# Altium PCB OD12_LCD__Layout.PcbDoc
Units mil, origin at the board's own origin, x right, y up, seen from the top; angles counter-clockwise.
Board outline 7224.41 x 2559.06 mil, 2 copper layers (Top Layer, Bottom Layer); 78 components, 63 nets, 348 pads, 111 vias.
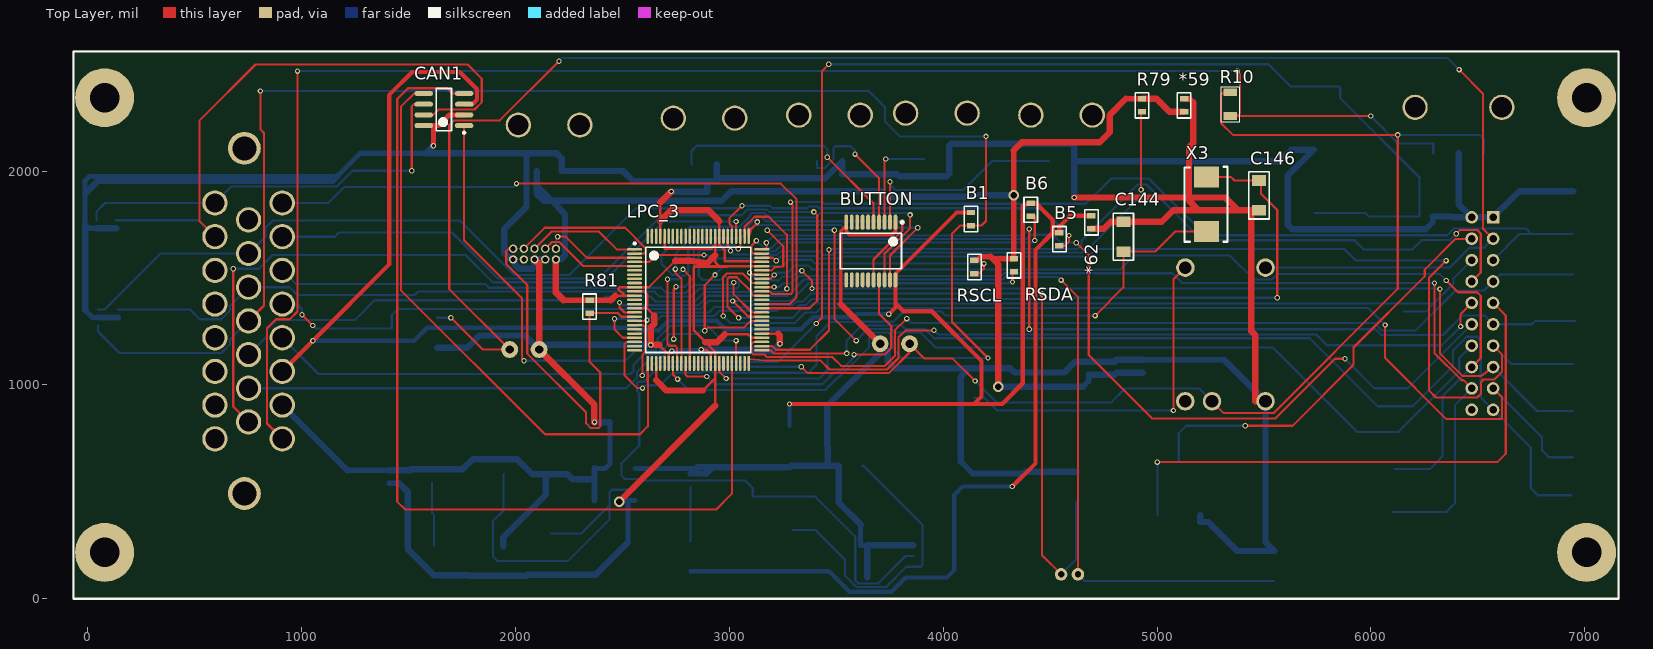
[diagram p0: Top Layer view]
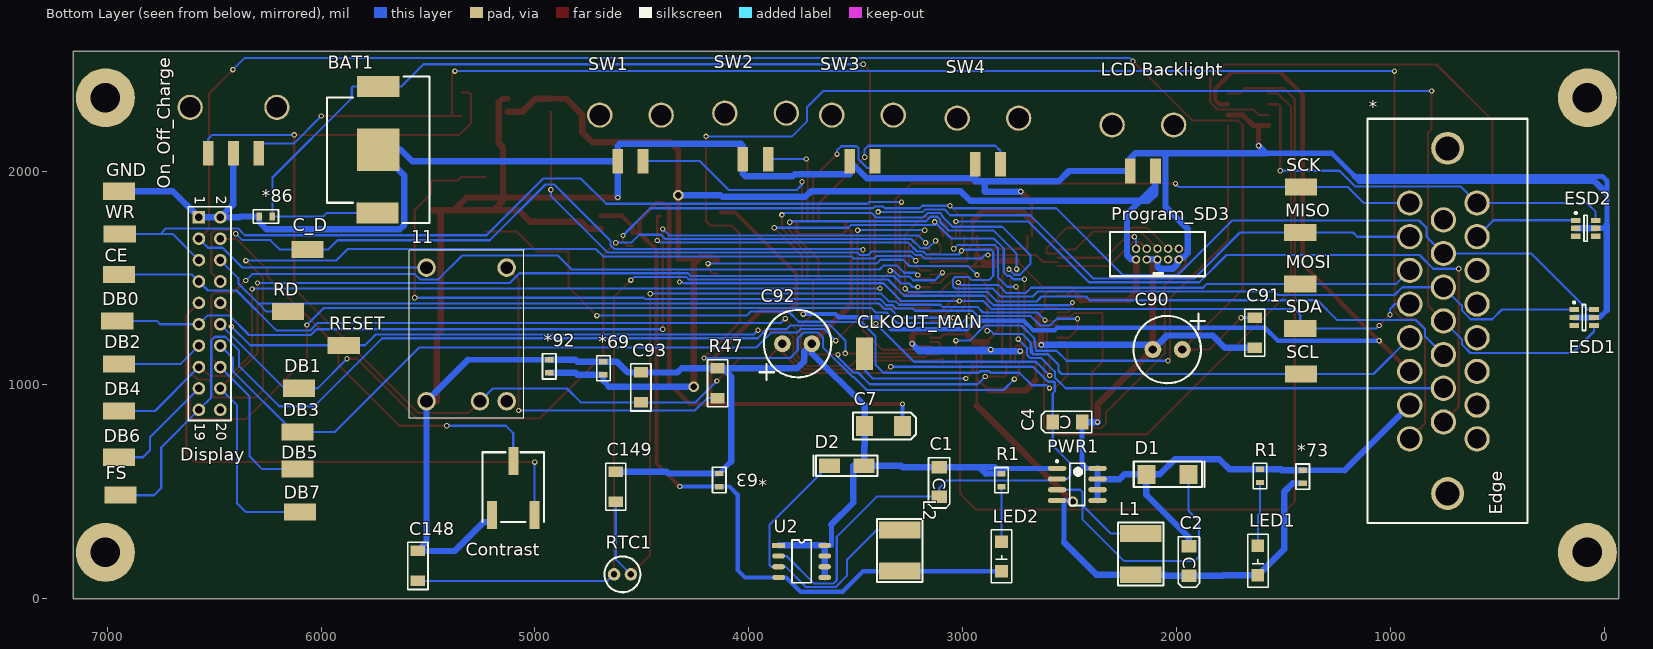
[diagram p1: Bottom Layer view, seen from below]

## Layer stack, top to bottom
Top Solder: solder mask 0.4, Solder Resist, Dk 3.5
Top Layer: signal copper 1.4
Dielectric1: dielectric 12.6, FR-4, Dk 4.8
Bottom Layer: signal copper 1.4
Bottom Solder: solder mask 0.4, Solder Resist, Dk 3.5

## Board outline
-66.93,0 7157.48,0 7157.48,2559.06 -66.93,2559.06

## Design rules (kind name [scope] priority, off if disabled: settings)
Clearance Via-Pad [IsVia vs IsPad] p1: gap=10
Clearance "Via Clearance" [IsVia vs IsVia] p2: gap=10
Clearance [All] p3: gap=7
Clearance Clearance_1 [All] p4: gap=10
Height [All] p1: minheight=0 maxheight=2000 prefheight=500
PlaneClearance [All] p1: clearance=10
PlaneConnect [All] p1: planeconnectstyle=Relief reliefexpansion=10 reliefentries=2 reliefconductorwidth=10 reliefairgap=10
PolygonConnect [All] p1: connectstyle=Relief reliefconductorwidth=10 reliefentries=2 polygonreliefangle="90 Angle" airgapwidth=10
RoomDefinition U_power_supplies [InComponentClass('U_power_supplies')] p1: confinementstyle=ConfineIn formatcopy=TRUE lockcomponents=FALSE outline 1555.12,39.37 3937.01,39.37 3937.01,893.7 1555.12,893.7
RoutingVias "Power Via" [(InNet('3V3') OR InNet('12V') OR InNet('12VIN') OR InNet('12VSwitched') OR InNet('3V3Temp') OR InNet('5VTEMP')  )] p1: holewidth=30 width=50 viastyle="Through Hole" minholewidth=10 minwidth=40 maxholewidth=40 maxwidth=60
RoutingVias [All] p2: holewidth=15 width=25 viastyle="Through Hole" minholewidth=15 minwidth=20 maxholewidth=30 maxwidth=60
SMDNeckDown SMDNeckDown_1 [All] p1: percent=100.000
SMDNeckDown [All] p2: percent=50.000
SMDNeckDown SMDNeckDown_2 [All] p3: percent=25.000
SilkToSolderMaskClearance SilkscreenOverComponentPads [IsPad] p1: minsilkscreentomaskgap=10 clearancetoexposedcopper=TRUE
SolderMaskExpansion [All] p1: expansion=4
UnpouredPolygon [All] p1: allowunpoured=FALSE
Width 3A [(InNet('3V3') OR InNet('12V') OR InNet('12VIN') OR InNet('12VSwitched') OR InNet('3V3Temp') )] p1: maxlimit=40 minlimit=10 preferedwidth=30
Width 2A [(InNet('5VTEMP') OR InNet('GND'))] p2: maxlimit=40 minlimit=10 preferedwidth=30
Width 1A [(InNet('5V') OR InNet('5VSENSOR') OR InNet('5VSENSOR2'))] p3: maxlimit=30 minlimit=10 preferedwidth=20
Width [All] p4: maxlimit=10 minlimit=7 preferedwidth=10
25 further rules are at their usual default settings.

## Classes and differential pairs
component class OD11_LCD__Layout: 11 * *59 *62 *63 *69 *73 *86 *92 B1 B5 B6 BAT1 BUTTON C90 C91 C92 C93 C144 C146 C148 C149 C_D CAN1 CE CLKOUT_MAIN Contrast DB0 DB1 DB2 DB3 DB4 DB5 DB6 DB7 Display ESD1 ESD2 FS GND "LCD Backlight" LPC_3 MISO MOSI On_Off_Charge Program_SD3 R10 R47 R79 R81 RD RESET RSCL RSDA RTC1 SCK SCL SDA SW1 SW2 SW3 SW4 TP26 WR X3
component class U_power_supplies: C1 C2 C4 C7 D1 D2 L1 L2 LED1 LED2 PWR1 R1 U2

## Components (designator, comment, footprint, x,y, rotation, side; value= is the part's Value field where it differs from the comment)
11 "PTH12000W" PowerModule 5586.61,843.4 r90 bottom
* "AMPSEAL (23)" "AMPSEAL (23) HOR" 909.45,748.03 r90 bottom
*59 ".1uF 0603" "0603/1608 SMD Resistor" 5125.98,2307.09 r90 top
*62 ".1uF 0603" "0603/1608 SMD Resistor" 4692.91,1759.84 r270 top
*63 ".1uF 0603" "0603/1608 SMD Resistor" 4137.8,555.12 r90 bottom
*69 ".1uF 0603" "0603/1608 SMD Resistor" 4679.73,1077.75 r270 bottom
*73 ".1uF 0603" "0603/1608 SMD Resistor" 1409.45,570.87 r90 bottom
*86 ".1uF 0603" "0603/1608 SMD Resistor" 6257.5,1787.4 r180 bottom
*92 ".1uF 0603" "0603/1608 SMD Resistor" 4933.07,1086.61 r90 bottom
B1 "0603/1608 SMD Resistor" "0603/1608 SMD Resistor" 4129.92,1775.59 r270 top
B5 "0603/1608 SMD Resistor" "0603/1608 SMD Resistor" 4543.31,1681.1 r270 top
B6 "0603/1608 SMD Resistor" "0603/1608 SMD Resistor" 4409.45,1818.9 r90 top
BAT1 "10MM Coin Cell" "10MM Coin Cell" 5732.28,2099.61 r90 bottom
BUTTON "Switch Debouncer" SOP65P780X199-20N 3661.42,1625.98 r270 top
C1 "15 uF Tantalum Capacitor" "1206 (POLAR)" 3109.51,546.54 r270 bottom
C2 "220 uF Tantalum Capacitor" "1206 (POLAR)" 1942.13,176.46 r270 bottom
C4 "15 uF Tant" "1206 (POLAR)" 2509.85,826.06 r0 bottom
C7 "220 uF Tant" "2312 Surface Mount (POLAR)" 3241.78,855.06 r270 bottom
C90 "100uF DC-DC Cap" "100uF DC-DC Cap" 2110.24,1165.35 r180 bottom
C91 ".1uF" 1206 1633.86,1244.09 r90 bottom
C92 "100uF DC-DC Cap" "100uF DC-DC Cap" 3704.72,1192.91 r0 bottom
C93 ".1uF" 1206 4503.94,988.19 r270 bottom
C144 "18pF surface mount cap" 1206 4842.52,1692.91 r270 top
C146 "18pF surface mount cap" 1206 5476.38,1885.83 r90 top
C148 "22pF surface mount cap" 1206 5547.24,153.54 r270 bottom
C149 "22pF surface mount cap" 1206 4622.05,523.62 r270 bottom
C_D "Test Point" "Test Point" 6062.99,1633.86 r180 bottom
CAN1 "CAN MAX3059" TJA1040 1665.35,2287.4 r180 top
CE "Test Point" "Test Point" 6944.88,1515.75 r180 bottom
CLKOUT_MAIN "Test Point" "Test Point" 3459.06,1145.67 r90 bottom
Contrast "Trimpot" TrimPot 5224.41,326.77 r180 bottom
D1 "B260A Flyback Diode" DO-214AC#1 1892.91,546.54 r0 bottom
D2 "B260A" DO-214AC#2 3673,657.48 r180 bottom
DB0 "Test Point" "Test Point" 6952.76,1299.21 r180 bottom
DB1 "Test Point" "Test Point" 6102.36,984.25 r180 bottom
DB2 "Test Point" "Test Point" 6944.88,1098.43 r180 bottom
DB3 "Test Point" "Test Point" 6110.24,779.53 r180 bottom
DB4 "Test Point" "Test Point" 6944.88,877.95 r180 bottom
DB5 "Test Point" "Test Point" 6110.24,606.3 r180 bottom
DB6 "Test Point" "Test Point" 6944.88,661.42 r0 bottom
DB7 "Test Point" "Test Point" 6098.43,405.51 r180 bottom
Display "Header 10X2" HDR2X10 6570.87,1783.46 r270 bottom
ESD1 "ESD Array" ESD_Array_BZA408B 94.49,1314.96 r180 bottom
ESD2 "ESD Array" ESD_Array_BZA408B 86.61,1732.28 r180 bottom
FS "Test Point" "Test Point" 6937.01,484.25 r180 bottom
GND "Test Point" "Test Point" 6944.88,1905.51 r0 bottom
L1 "ASPI-6045S" ASPI-6045 2162.6,305.21 r180 bottom
L2 "Inductor" ASPI-6045 3290.62,322.13 r180 bottom
"LCD Backlight" "Micro-Fit 2 Pos Hor SMD" "Micro-fit 2 Pos Hor SMD - duplicate" 2098.43,2000 r0 bottom
LED1 "Green LED 1206" "Cathode Mark 1206 led footprint" 1619.29,109.53 r90 bottom
LED2 "Green LED 1206" "Cathode Mark 1206 led footprint" 2818.11,129.21 r90 bottom
LPC_3 "LPC1768" LPC1768 2854.33,1397.64 r0 top
MISO "Test Point" "Test Point" 1421.26,1712.6 r180 bottom
MOSI "Test Point" "Test Point" 1421.26,1472.44 r180 bottom
On_Off_Charge "Micro-Fit 3 Pos Hor SMD_1" "Micro-fit 3 Pos Hor SMD - duplicate1" 6291.34,2082.68 r0 bottom
Program_SD3 "JTAG10" "JTAG10 Polarity" 2188.98,1586.61 r90 bottom
PWR1 "MIC4680" TJA1040 2463.78,534.73 r180 bottom
R1 "0603 Res" "0603/1608 SMD Resistor" 2818.11,554.41 r270 bottom
R1 "0603 Res" "0603/1608 SMD Resistor" 1609.45,574.1 r270 bottom
R10 "0k" "1206 surface mount resistor" 5342.52,2312.4 r270 top
R47 "1206 RES" 1206 4145.67,1007.87 r270 bottom
R79 "0603/1608 SMD Resistor" "0603/1608 SMD Resistor" 4929.13,2307.09 r90 top
R81 "0603/1608 SMD Resistor" "0603/1608 SMD Resistor" 2346.46,1366.14 r90 top
RD "Test Point" "Test Point" 6153.54,1342.52 r0 bottom
RESET "Test Point" "Test Point" 5893.7,1185.04 r0 bottom
RSCL "0603/1608 SMD Resistor" "0603/1608 SMD Resistor" 4145.67,1551.18 r90 top
RSDA "0603/1608 SMD Resistor" "0603/1608 SMD Resistor" 4330.71,1559.06 r90 top
RTC1 "32.768kHz oscillator" "32.768kHz Oscillator" 4590.55,114.17 r180 bottom
SCK "Test Point" "Test Point" 1417.32,1925.2 r180 bottom
SCL "Test Point" "Test Point" 1417.32,1051.18 r180 bottom
SDA "Test Point" "Test Point" 1421.26,1263.78 r180 bottom
SW1 "Micro-Fit 2 Pos Hor SMD" "Micro-fit 2 Pos Hor SMD - duplicate" 4494.42,2046.04 r0 bottom
SW2 "Micro-Fit 2 Pos Hor SMD" "Micro-fit 2 Pos Hor SMD - duplicate" 3909.45,2055.12 r0 bottom
SW3 "Micro-Fit 2 Pos Hor SMD" "Micro-fit 2 Pos Hor SMD - duplicate" 3409.45,2046.04 r0 bottom
SW4 "Micro-Fit 2 Pos Hor SMD" "Micro-fit 2 Pos Hor SMD - duplicate" 2822.83,2031.5 r0 bottom
U2 "MIC4680-5.0" SOIC8 3750.98,181.1 r180 bottom
WR "Test Point" "Test Point" 6940.94,1704.72 r0 bottom
X3 "12MHz oscillator" "12MHZ Oscillator" 5231,1716.54 r90 top

## Footprints (in the part's own frame and the unit in brackets; to place one, negate y for a bottom-side part, rotate by r counter-clockwise, add the part's x,y. Pads: shape width x height; smd on the part's side, far side on the other; paste and mask are expansions set on the pad)
"10MM Coin Cell" [mm] "BHX1-1025-SM"
  rect 2.5x5 smd: 1(-7.5,0.1) 1(7.5,0)
  rect 5x5 smd: 2(0,0)
  silkscreen extent -8.7,-6.1 8.7,6.1, body extent -6.3,-6.1 6.2,6.1, height 4
"12MHZ Oscillator" [mm] "ABM2-12.000MHZ-D4Y-T"
  rect 2.5x3 smd: 1(0,0) 2(6.5,0)
  silkscreen extent -1.2,-2.5 7.7,2.6, body extent -1.2,-2.5 7.6,2.6, height 1.5
"32.768kHz Oscillator" [mm] "CFS-206"
  round 1.5 hole 0.75: 1(-0.992,0) 2(1,0)
  silkscreen extent -2.13,-2.13 2.13,2.13, body extent -0.99,-1 1,1, height 7
"100uF DC-DC Cap" [mm]
  round 2 hole 1: 1(3.5,0) 2(0,0)
  silkscreen extent -2.3,-4 6.2,4.3, body extent -2.27,-4.1 5.7,3.89, height 12.01
"0603/1608 SMD Resistor" [mm]
  rect 0.65x1 smd: 1(0.775,0) 2(-0.775,0)
  silkscreen extent -1.5,-0.8 1.5,0.8, body extent -0.8,-0.5 0.8,0.5, height 1.2
1206 [mm]
  rect 1.25x1.7 smd: 1(-1.775,0) 2(1.775,0)
  silkscreen extent -2.8,-1.2 2.8,1.2, body extent -1.6,-0.8 1.6,0.8, height 1.2
"1206 (POLAR)" [mm]
  rect 1.5x1.8 smd: 1(1.75,0) 2(-1.75,0)
  silkscreen extent -2.87,-1.27 3.1,1.27, body extent -1.6,-0.9 1.6,0.9, height 1.2
"1206 surface mount resistor" [mm]
  rect 0.9x1.6 smd: 1(-1.4,0) 2(1.4,0)
  silkscreen extent -2.1,-1.1 2.1,1.1
"2312 Surface Mount (POLAR)" [mm]
  rect 2.4x2 smd: 1(1.2,-1) 2(1.2,-5.5)
  silkscreen extent -0.4,-6.9 2.8,0.6
"AMPSEAL (23) HOR" [mm]
  round 3 hole 2.286: 1(0,0) 2(4,0) 3(8,0) 4(12,0) 5(16,0) 6(20,0) 7(24,0) 8(28,0) 9(2,-4) 10(6,-4) 11(10,-4) 12(14,-4) 13(18,-4) 14(22,-4) 15(26,-4) 16(0,-8) 17(4,-8) 18(8,-8) 19(12,-8) 20(16,-8) 21(20,-8) 22(24,-8) 23(28,-8)
  round 3.9 hole 2.85: ""(-6.5,-4.5) ""(34.5,-4.5)
  silkscreen extent -10,-14 38,5
ASPI-6045 [mm]
  rect 4.9x2 smd: 1(-0.1,0) 2(-0.1,-4.9)
  silkscreen extent -2.8,-6.2 2.6,1.3, body extent -2.5,-5.5 2.3,0.5, height 4.5
"Cathode Mark 1206 led footprint" [mm] "OSRAM semiconductor"
  rect 1.5x1.5 smd: +(0,0) -(3.5,0)
  silkscreen extent -1.4,-1.2 4.9,1.2, body extent 0,-0.7 3.6,0.7, height 1
DO-214AC#1 [mm]
  rect 2.16x2.26 smd: 1(1.3,-0.9) 2(6.3,-0.9)
  silkscreen extent -0.6,-2.4 7.8,0.6
DO-214AC#2 [mm]
  rect 2.5x1.7 smd: 1(1.3,-0.9) 2(5.4,-0.9)
  silkscreen extent -0.6,-2.1 7,0.3
ESD_Array_BZA408B [mm] "SOT23, 6-Leads, Body 3.1x3.0mm (max), Pitch 0.95mm, IPC Medium Density"
  rect 1.15x0.6 smd: 1(-1.175,0.95) 2(-1.175,0) 3(-1.175,-0.95) 4(1.175,-0.95) 5(1.175,0) 6(1.175,0.95)
  silkscreen extent -1.3,-1.55 0.2,1.92, body extent -0.85,-1.55 0.85,1.55, height 1.1
HDR2X10 [mm] "Connector; Header; 10x2 Position"
  rect 1.5x1.5 hole 0.9: 1(0,0)
  round 1.5 hole 0.9: 2(0,2.54) 3(2.54,0) 4(2.54,2.54) 5(5.08,0) 6(5.08,2.54) 7(7.62,0) 8(7.62,2.54) 9(10.16,0) 10(10.16,2.54) 11(12.7,0) 12(12.7,2.54) 13(15.24,0) 14(15.24,2.54) 15(17.78,0) 16(17.78,2.54) 17(20.32,0) 18(20.32,2.54) 19(22.86,0) 20(22.86,2.54)
  silkscreen extent -1.27,-1.27 24.13,3.81
"JTAG10 Polarity" [mm] "3220-10-0100-00"
  round 1 hole 0.6: 1(0,0) 2(1.27,0) 3(0,-1.27) 4(1.27,-1.27) 5(0,-2.54) 6(1.27,-2.54) 7(0,-3.81) 8(1.27,-3.81) 9(0,-5.08) 10(1.27,-5.08)
  silkscreen extent -2,-8.2 3.25,3.1, body extent -2,-8.2 3.25,3.1, height 5.4
LPC1768 [mm] "TSQFP, 100-Leads, Body 16.3x16.3mm (max), Pitch 0.50mm, IPC Medium Density"
  oval 1.8x0.3 smd: 1(-7.55,6) 2(-7.55,5.5) 3(-7.55,5) 4(-7.55,4.5) 5(-7.55,4) 6(-7.55,3.5) 7(-7.55,3) 8(-7.55,2.5) 9(-7.55,2) 10(-7.55,1.5) 11(-7.55,1) 12(-7.55,0.5) 13(-7.55,0) 14(-7.55,-0.5) 15(-7.55,-1) 16(-7.55,-1.5) 17(-7.55,-2) 18(-7.55,-2.5) 19(-7.55,-3) 20(-7.55,-3.5) 21(-7.55,-4) 22(-7.55,-4.5) 23(-7.55,-5) 24(-7.55,-5.5) 25(-7.55,-6) 51(7.55,-6) 52(7.55,-5.5) 53(7.55,-5) 54(7.55,-4.5) 55(7.55,-4) 56(7.55,-3.5) 57(7.55,-3) 58(7.55,-2.5) 59(7.55,-2) 60(7.55,-1.5) 61(7.55,-1) 62(7.55,-0.5) 63(7.55,0) 64(7.55,0.5) 65(7.55,1) 66(7.55,1.5) 67(7.55,2) 68(7.55,2.5) 69(7.55,3) 70(7.55,3.5) 71(7.55,4) 72(7.55,4.5) 73(7.55,5) 74(7.55,5.5) 75(7.55,6)
  oval 0.3x1.8 smd: 26(-6,-7.55) 27(-5.5,-7.55) 28(-5,-7.55) 29(-4.5,-7.55) 30(-4,-7.55) 31(-3.5,-7.55) 32(-3,-7.55) 33(-2.5,-7.55) 34(-2,-7.55) 35(-1.5,-7.55) 36(-1,-7.55) 37(-0.5,-7.55) 38(0,-7.55) 39(0.5,-7.55) 40(1,-7.55) 41(1.5,-7.55) 42(2,-7.55) 43(2.5,-7.55) 44(3,-7.55) 45(3.5,-7.55) 46(4,-7.55) 47(4.5,-7.55) 48(5,-7.55) 49(5.5,-7.55) 50(6,-7.55) 76(6,7.55) 77(5.5,7.55) 78(5,7.55) 79(4.5,7.55) 80(4,7.55) 81(3.5,7.55) 82(3,7.55) 83(2.5,7.55) 84(2,7.55) 85(1.5,7.55) 86(1,7.55) 87(0.5,7.55) 88(0,7.55) 89(-0.5,7.55) 90(-1,7.55) 91(-1.5,7.55) 92(-2,7.55) 93(-2.5,7.55) 94(-3,7.55) 95(-3.5,7.55) 96(-4,7.55) 97(-4.5,7.55) 98(-5,7.55) 99(-5.5,7.55) 100(-6,7.55)
  silkscreen extent -7.67,-6.25 6.25,6.82, body extent -7,-7 7,7, height 1.6
"Micro-fit 2 Pos Hor SMD - duplicate" [mm]
  rect 1.27x2.92 smd: 1(3,0) 2(0,0)
  round 3 hole 2.41: ""(-2.16,-5.47) ""(5.14,-5.47)
  body extent -3.32,-10.05 6.33,0.69, height 5.73
"Micro-fit 3 Pos Hor SMD - duplicate1" [mm]
  rect 1.27x2.92 smd: 1(6,0) 2(3,0) 3(0,0)
  round 3 hole 2.41: ""(-2.16,-5.47) ""(8.14,-5.47)
  body extent -3.32,-10.15 9.33,0.59, height 5.73
PowerModule [mm]
  round 2.2 hole 1.5: 1(2.03,-2.03) 2(2.03,-8.38) 3(2.03,-11.56) 4(17.91,-11.55) 5(17.91,-2.03)
  silkscreen extent 0,-13.62 19.94,0, body extent 0,-13.59 19.94,0, height 8.5
SOIC8 [mm]
  rect 1.52x0.6 smd: 1(-2.782,1.742)
  oval 1.52x0.6 smd: 2(-2.782,0.472) 3(-2.782,-0.798) 4(-2.782,-2.068) 5(2.698,-2.068) 6(2.698,-0.798) 7(2.698,0.472) 8(2.698,1.742)
  silkscreen extent -1.19,-2.7 1.1,2.38
SOP65P780X199-20N [mm] "SOP, 20-Leads, Body 7.3x5.4mm (max), Pitch 0.65mm, IPC Medium Density"
  oval 1.8x0.45 smd: 1(-3.425,2.925) 2(-3.425,2.275) 3(-3.425,1.625) 4(-3.425,0.975) 5(-3.425,0.325) 6(-3.425,-0.325) 7(-3.425,-0.975) 8(-3.425,-1.625) 9(-3.425,-2.275) 10(-3.425,-2.925) 11(3.425,-2.925) 12(3.425,-2.275) 13(3.425,-1.625) 14(3.425,-0.975) 15(3.425,-0.325) 16(3.425,0.325) 17(3.425,0.975) 18(3.425,1.625) 19(3.425,2.275) 20(3.425,2.925)
  silkscreen extent -3.55,-3.65 2.13,3.83, body extent -2.69,-3.66 2.69,3.67, height 1.99
"Test Point" [mil]
  rect 150x80 smd: 1(0,0)
  body extent -75,-30 75,30, height 90
TJA1040 [mm] "SOIC, 8-Leads, Body 5.0x4.0mm (max), Pitch 1.27mm, IPC Medium Density"
  oval 2.2x0.6 smd: 1(-2.4,1.905) 2(-2.4,0.635) 3(-2.4,-0.635) 4(-2.4,-1.905) 5(2.4,-1.905) 6(2.4,-0.635) 7(2.4,0.635) 8(2.4,1.905)
  silkscreen extent -2.53,-2.5 0.9,2.88, body extent -2,-2.5 2,2.5, height 1.75
TrimPot [mm] "3361P-1-103GLF"
  rect 1.19x3.3 smd: 1(5.675,1.65) 2(3.135,8.05) 3(0.595,1.65)
  silkscreen extent -0.5,0.8 6.8,9.1, body extent -0.5,0.8 6.8,9.1, height 5.5

## Part data
11: "Adj 6A 12Vin Power Module"
*59 *62 *63 *69 *73 *86 *92: library part "0603 Cap"
C1: "1206 Surface Mount Capacitor"
C2 C4: library part "15 uF Tantalum Capacitor", "1206 Surface Mount Capacitor"
C7: library part "220 uF Tantalum Capacitor", "2312 Surface Mount Capacitor"
C91 C93: library part "1206 CAP", ".1 uF decoupling caps.  you probably want this for your project"
C144 C146: "1206 cap for loading a crystal oscillator"
C148 C149: library part "20pF surface mount cap", "1206 cap for loading the crystal oscillator"
D2: library part "B260A Flyback Diode"
Display: "Header, 10-Pin, Dual row"
ESD1 ESD2: "BZA408B,115"
L1: "68 uH 1.2A surface mount inductor"
LED1 LED2: library part "1206 Green LED", "Green surface mount LED"
LPC_3: "100 pin ARM microcontroller"
Program_SD3: "3220-10-0100-00"
PWR1: "3.3V Fixed Switching Regulator 1A"
R10: library part "Blank Resistor Surface mount 1206", "Blank surface mount resistor."
R47: "0 ohm surface mount resistor."
RTC1: library part 32.768kHz, "32.768kHz surface mount oscillator"
U2: "5V Fixed Switching Regulator 1A"
X3: "12MHz surface mount oscillator"

## Free pads (board coordinates)
  round 275.59 hole 137.8: ""(78.74,216.54) ""(78.74,2342.52) ""(7007.87,216.54) ""(7007.87,2342.52)

## Via types
v1: diameter 25, hole 15, Top Layer to Bottom Layer, 108 vias
v2: diameter 50, hole 30, Top Layer to Bottom Layer, 3 vias

## Nets (pads, with @x,y where several pads share a name; then routed paths per layer and width w, separated by ;. In a path a pad name is that pad's centre, name@x,y a point inside that pad or via, vN(x,y) a via of type N, cw(c..) or ccw(c..) an arc to the next point about the centre after c; other vN are vias at no path point)
3V3: "LCD Backlight.2" *59.2 *69.1 *73.2 *92.2 C2.1 L1.2 LED1.+ LPC_3.10 LPC_3.12 LPC_3.28 LPC_3.42 LPC_3.54 LPC_3.71 LPC_3.84 LPC_3.96 Program_SD3.1 PWR1.4 R79.1 R81.1 RSCL.1 RSDA.1 | length 11809.6
  Top Layer w11.81: 2466.82,1417.32 2512,1417.32 ; LPC_3.12 2512,1417.32 ; 2657.48,1021.15 LPC_3.28 ; LPC_3.96 2696.85,1638 2697.78,1637.07 2916.14,1637.07 2933.07,1654 ; 2746.81,1580.5 2623,1456.69 LPC_3.10 2487.37,1456.69 2480,1449.32 2512,1417.32 ; 2876.76,973.69 2933.07,1030 ; 2933.07,902.07 2933.07,1030 ; LPC_3.84 2933.07,1654 ; 2979,1236 3088,1236 3103.53,1220.47 LPC_3.54 ; 2834,1551 2838.12,1555.12 2951.95,1555.12 ; 2834,1551 LPC_3.71 2951.95,1555.12 ; 2834,1551 2834,1254 2887.73,1200.27 2933.07,1154.93 LPC_3.42 2933.07,1062 2933.07,1030 ; 2933.07,1654 2933.07,1606 2933.07,1574 2951.95,1555.12
  Top Layer w25.59: 2224,1396.65 R81.1 2446.16,1396.65 ; RSCL.1 4157.95,1581.69 4175.55,1599.3 4222.3,1599.3 ; 4232.03,1589.57 RSDA.1@4330,1589.57 ; 4330,2097 v2(4330,1887) RSDA.1@4330,1589.57 ; RSDA.1 RSDA.1@4330,1589.57 ; 4854,2337.6 R79.1
  Top Layer w30: Program_SD3.1 2188.98,1431.68 2224,1396.65 ; 2446.16,1396.65 2466.82,1417.32 ; v2(2485,454) 2933.07,902.07 ; 2657.48,1021.15 2704.94,973.69 2876.76,973.69 ; 2746.81,1580.5 2817,1580.5 2896.35,1569.28 2933.07,1606 ; 2887.73,1200.27 2943.27,1200.27 2979,1236 ; 4222.3,1599.3 4232.03,1589.57 4257,1564.59 v2(4257,992) ; 4330,2097 4368,2135 4731,2135 4778,2182 4778,2261.6 4854,2337.6 ; R79.1 4997,2337.6 5058.02,2276.57 *59.2
  Bottom Layer w23.62: v2(2485,454) 2490.73,459.73 PWR1.4@2526,459.73 ; 2526,264 PWR1.4@2526,459.73 ; PWR1.4 PWR1.4@2526,459.73
  Bottom Layer w25.59: *73.2 1456,540.35 ; 4654,992 4680,1018 4680,1047.24 *69.1
  Bottom Layer w30: 1456,540.35 1497,499.35 1497,231.82 LED1.+ 1779,109.53 1780.97,107.56 C2.1 2051,107.56 2055.73,112.29 L1.2 2374.29,112.29 2526,264 ; 2098.43,2000 2098.43,1931.57 ; Program_SD3.1 2211.61,1586.61 2231.5,1606.5 2231.5,1798.5 2169,1861 ; v2(4257,992) 4654,992 ; v2(4330,1887) 4131,1887 4123,1879 3736,1879 3709,1906 3010,1906 2965,1861 2169,1861 ; *69.1@4680,1047.24 4801,1047.24 4809.86,1056.1 *92.2 ; 2098.43,1931.57 2169,1861 ; 2098.43,1931.57 2098.43,1894 2131.43,1861 2169,1861
4V: 11.5 C90.1 C91.2 Display.3 | length 8417.4
  Top Layer w10: v1(1698,1313.98) 1846.62,1165.35 C90.1 1690,1447.79 1690,2214 1713,2237 1927,2237 v1(2203,2513) ; v1(6412,2474) 6524,2362 6524,1730.33 Display.3
  Bottom Layer w10: C91.2 v1(1698,1313.98) ; v1(2203,2513) 2219,2529 6357,2529 v1(6412,2474) ; 11.5 6367.98,1548.52 6460.46,1641 6528.4,1641 Display.3
5V: *62.2 *63.2 *.3 B1.2 B5.2 B6.1 BUTTON.20 C7.1 CAN1.3 L2.2 LED2.+ U2.4 | length 12044.5
  Top Layer w17.72: 3776.57,1362 3776.57,1382 BUTTON.20 3776.57,1519.91 4062.77,1806.1
  Top Layer w20: *.3 v1(1052.46,1206) 1409,1562.54 1409,2354.91 1517.09,2463 1739.15,2463 1820.15,2382 1820.15,2333.59 1798.96,2312.4 CAN1.3 ; v1(3281.15,911) 4144,911 ; v1(3745.57,1331) 3776.57,1362 ; 3776.57,1382 3814.57,1344 3946,1344 4179,1111 4179,946 4144,911 ; 4062.77,1806.1 B1.2 ; v1(4323,524.61) 4431.5,633.11 4431.5,1631.12 4512,1711.62 ; B5.2 B5.2@4543,1711.62 ; *62.2 4592,1790.36 4543,1741.36 B5.2@4543,1711.62 ; 4144,911 4275.5,911 4372,1007.5 4372,1838 B6.1 4433.59,1849.41 4512,1771 4512,1711.62 ; 4512,1711.62 B5.2@4543,1711.62
  Bottom Layer w20: v1(1052.46,1206) 1526,1206 1587,1267 2558,1267 2569,1256 2671,1256 2714.5,1299.5 2941.15,1299.5 2980.65,1260 3335.5,1260 3392,1316.5 3579.57,1316.5 3594.07,1331 v1(3745.57,1331) ; LED2.+ L2.2 3464.79,129.21 3561,33 3758.05,33 3824.71,99.67 U2.4 4017.67,99.67 4052,134 4052,486 4090.61,524.61 *63.2 v1(4323,524.61) ; C7.1 v1(3281.15,911)
BUT1: BUTTON.2 SW1.2 | length 1013.4
  Top Layer w10: BUTTON.2 v1(3750.98,1950)
  Bottom Layer w10: v1(3750.98,1950) 3750.98,1936.61 3776,1911.6 4093.6,1911.6 4229,2047 4494.42,2047 SW1.2
BUT1U: BUTTON.19 LPC_3.33 LPC_3.76 | length 2216.1
  Top Layer w10: v1(2711,1493.85) 2711,1190 2718.17,1182.83 2747.08,1182.83 2755.91,1174 LPC_3.33 ; 3130,1748 v1@3130,1756.26 ; v1(3130,1762) v1@3130,1756.26 ; BUTTON.19 3750.98,1604.98 v1(3881,1735) ; 3103.74,1730 LPC_3.76 3090.55,1730 3103.74,1730 ; 3103.74,1730 v1@3130,1756.26
  Bottom Layer w10: v1(2711,1493.85) 2761.81,1493.85 2778.35,1510.39 2792,1510.39 2807.5,1525.89 2807.5,1638.5 2853,1684 3052,1684 v1(3130,1762) ; 3130,1748 3521,1748 3534,1735 v1(3881,1735)
BUT2: BUTTON.3 SW2.2 | length 476.8
  Top Layer w10: BUTTON.3 3725.39,2050.39 v1(3731,2056)
  Bottom Layer w10: v1(3731,2056) 3909.45,2056 SW2.2
BUT2U: BUTTON.18 LPC_3.36 | length 2246.4
  Top Layer w10: v1(2783,1540) 2814.96,1508.04 LPC_3.36 ; BUTTON.18 3725.39,1613.28 3845,1732.89 v1(3845,1795)
  Bottom Layer w10: v1(2783,1540) 2758,1515 2733,1515 2683,1565 2683,1607 2815.3,1739.3 3047.3,1739.3 3091,1783 3104,1803.5 3163.5,1803.5 3185,1782 3403,1782 3424,1803 3837,1803 v1(3845,1795)
BUT3: BUTTON.4 SW3.2 | length 673.1
  Top Layer w10: v1(3587,2079) 3699.8,1966.2 BUTTON.4
  Bottom Layer w10: SW3.2 3409.45,2014 3446,2014 3486,2054 3486,2106 3496,2116 3568,2116 3587,2097 v1(3587,2079)
BUT3U: BUTTON.17 LPC_3.35 | length 1453.2
  Top Layer w10: LPC_3.35 2795.28,1046 2802.28,1039 v1(2894,1039) ; v1(3583,1141.54) 3726,1141.54 3757,1172.54 3757,1275 3699.8,1332.2 BUTTON.17
  Bottom Layer w10: v1(2894,1039) 2930,1003 3433.94,1003 3488.94,1058 3511,1058 3583,1130 v1(3583,1141.54)
BUT4: BUTTON.5 SW4.2 | length 1144.9
  Top Layer w10: v1(3458,2064) 3674.21,1847.79 BUTTON.5
  Bottom Layer w10: SW4.2 2822.84,2093.84 2847,2118 3442,2118 3458,2102 v1(3458,2064)
BUT4U: BUTTON.16 LPC_3.34 | length 1998.6
  Top Layer w10: v1(2747.5,1541.5) 2747.5,1524.28 2775.59,1496.19 LPC_3.34 ; BUTTON.16 3674.21,1586.14 3808,1719.93 v1(3808,1760)
  Bottom Layer w10: v1(2747.5,1541.5) 2747.5,1612.45 2857.35,1722.3 3065.8,1722.3 3105.5,1762 3105.5,1774 3118,1786.5 3150,1786.5 3171.5,1765 3803,1765 v1(3808,1760)
C_D: C_D.1 Display.8 LPC_3.52 | length 4334.4
  Top Layer w10: LPC_3.52 3201.9,1181.1 3218.66,1164.34 3376.34,1164.34 3466,1254 v1(3466,1632) ; v1(6399,1707) 6417,1725 6496,1725 6513,1708 6513,1525.6 Display.8
  Bottom Layer w10: v1(3466,1632) 3469.5,1635.5 4628.35,1635.5 4646.85,1654 4646.85,1674.85 4909,1937 4950,1937 5211,1676 5923,1676 5965.14,1633.86 C_D.1 6193.86,1633.86 6237,1677 6369,1677 v1(6399,1707)
CAN_H: *.22 CAN1.7 ESD2.1 | length 2927.5
  Top Layer w10: *.22 523,1764.4 523,2237 784,2498 1776,2498 1842.15,2431.85 1842.15,2322.15 1808,2288 1641.6,2288 1616,2262.4 CAN1.7
  Bottom Layer w10: ESD2.1 517.72,1769.69 *.22
CAN_L: *.23 CAN1.6 ESD2.6 | length 1956.2
  Top Layer w10: v1(1515,2001) 1515,2302.4 1525,2312.4 CAN1.6
  Bottom Layer w10: ESD2.6 40,1769.69 40,1810 80.39,1850.39 *.23 672.1,1928 1165,1928 1238,2001 v1(1515,2001)
CAP1: *.14 B5.1 ESD1.6 LPC_3.80 | length 5292.8
  Top Layer w10: LPC_3.80 3011.81,1743 3000,1754.81 3000,1778.81 v1(3058.69,1837.5) ; B5.1 4568.59,1650.59 4588,1670 v1(4588,1698.59)
  Bottom Layer w10: ESD1.6 80,1352.36 341.81,1614.17 *.14 831,1693.2 831,1734 866,1769 1739,1769 1994,1514 2250.98,1514 2562.98,1826 3047.19,1826 v1(3058.69,1837.5) 3189.5,1837.5 3201,1826 3363,1826 3370.5,1833.5 3412,1833.5 3419.5,1826 4460.59,1826 v1(4588,1698.59)
CAP2: *.13 B6.2 ESD1.1 LPC_3.81 | length 5222.7
  Top Layer w10: LPC_3.81 2992.13,1649.87 3005,1637 v1(3005,1627) ; B6.2 4428,1788.39 v1(4428,1675)
  Bottom Layer w10: ESD1.1 477.97,1352.36 523.43,1306.9 624,1306.9 665.55,1348.44 665.55,1370.27 *.13 944,1456.69 980.69,1420 1528,1420 1545,1437 2648,1437 2672,1413 2821,1413 2858.5,1450.5 3033.5,1450.5 3045,1462 3045,1494 3034,1505 2972.5,1505 2957.5,1490 2877,1490 2857,1510 2857,1622 2867,1632 3000,1632 v1(3005,1627) 3016,1616 3016,1609 3170,1609 3184.5,1623.5 3212.96,1623.5 3254.46,1665 4418,1665 v1(4428,1675)
CAP3: *.12 B1.1 ESD1.4 LPC_3.32 | length 8483.5
  Top Layer w10: *.12 824,1371.24 824,2178 807,2195 v1(807,2374) ; LPC_3.32 2736.22,1048.78 v1(2758,1027) ; v1(4200,2162) 4200,1766 4179.08,1745.08 B1.1 4080,1745.08 4041,1706.08 4041,1294 v1(4209,1126)
  Bottom Layer w10: ESD1.4 48,1277.56 48,1250 148.58,1149.42 624.96,1149.42 665.55,1190 665.55,1212.79 *.12 ; v1(807,2374) 3651,2374 3728,2297 3728,2231 3797,2162 v1(4200,2162) ; v1(2758,1027) 2809,976 3448.74,976 3509.74,1037 3514.35,1037 3653.35,1176 3653.35,1222 3675.64,1244.29 3743.71,1244.29 3771,1217 3771,1161.54 3806.54,1126 v1(4209,1126)
CE: CE.1 Display.7 LPC_3.53 | length 4253.6
  Top Layer w10: LPC_3.53 3112,1200.79 3104,1192.79 3104,1150 3112,1142 3163.34,1142 3175,1130.34 3481.76,1130.34 3523.18,1088.92 3727.71,1088.92 3774,1135.21 3774,1255 v1(3829,1310)
  Bottom Layer w10: v1(3829,1310) 3849,1290 6015.04,1290 6051.54,1253.5 6207.5,1253.5 6395,1441 6528.4,1441 Display.7 6603.15,1515.75 CE.1
CLKOUT_MAIN: CLKOUT_MAIN.1 LPC_3.43 | length 650.5
  Top Layer w10: LPC_3.43 2952.76,1062 v1(2984.76,1030)
  Bottom Layer w10: v1(2984.76,1030) 3419.59,1030 3459.06,1069.46 CLKOUT_MAIN.1
CS1: *.11 LPC_3.77 | length 3232.4
  Top Layer w10: LPC_3.77 3070.87,1738.87 3118.5,1786.5 3184.5,1786.5 3269,1702 v1(3269,1450)
  Bottom Layer w10: *.11 838,1227.76 838,1260.78 880,1302.78 1247.78,1302.78 1341,1396 2406,1396 2423,1413 2631,1413 2654.5,1389.5 2838.5,1389.5 2882.5,1433.5 3252.5,1433.5 v1(3269,1450)
CS2: *.10 LPC_3.78 | length 2886.6
  Top Layer w10: v1(2740,1214) 2740,1448 v1(2750.7,1458.7) ; v1(3041,1637) 3051.18,1647.18 LPC_3.78
  Bottom Layer w10: *.10 2518.25,984.25 2568.5,1034.5 2568.5,1062 2632.44,1125.94 2683.29,1125.94 2699.34,1142 2699.34,1173.34 v1(2740,1214) ; v1(2750.7,1458.7) 2791.17,1458.7 2834.14,1501.67 2834.14,1638 2849.64,1653.5 3024.5,1653.5 v1(3041,1637)
CS3: *.9 LPC_3.79 | length 3363.1
  Top Layer w10: v1(680,1543) 680,898.74 *.9 ; LPC_3.79 v1(3031.5,1763.8)
  Bottom Layer w10: v1(680,1543) 800,1543 864,1607 1766,1607 1893,1480 2408.96,1480 2692.76,1763.8 v1(3031.5,1763.8)
DB0: DB0.1 Display.11 LPC_3.75 | length 4400.9
  Top Layer w10: LPC_3.75 3173,1633.86 v1(3173,1665) ; v1(4402,1260) v1(4402,1729)
  Bottom Layer w10: v1(3173,1665) 3207,1699 4372,1699 v1(4402,1729) ; v1(4402,1260) 6021,1260 6048,1233 6337,1233 6429,1325 6529.33,1325 Display.11 6753,1283.46 6768.75,1299.21 DB0.1
DB1: DB1.1 Display.12 LPC_3.74 | length 4422.2
  Top Layer w10: v1(3126.25,1674.25) 3104,1652 3104,1622.17 3112,1614.17 LPC_3.74 ; v1(4622,1665) 4680,1607 4680,1140 4977,843 5553,843 5832,1122 v1(5878.25,1122)
  Bottom Layer w10: v1(3126.25,1674.25) 3160,1640.5 3198,1640.5 3239.5,1682 4391,1682 4411,1702 4512,1702 4549,1665 v1(4622,1665) ; v1(5878.25,1122) 6016,984.25 DB1.1 6171.65,984.25 Display.12
DB2: DB2.1 Display.13 LPC_3.73 | length 4885.2
  Top Layer w10: LPC_3.73 3204.51,1594.49 v1(3219,1580) ; v1(6351.07,1581) 6272,1501.93 6272,973 6304,941 6496,941 6514,959 6514,1013 6526,1025 6576,1025 6613,1062 6613,1141.33 Display.13
  Bottom Layer w10: v1(3219,1580) 3241.08,1602.08 3402.92,1602.08 3414.5,1590.5 3507.5,1590.5 3518,1601 4680,1601 4714,1635 5876,1635 5930,1581 v1(6351.07,1581) ; Display.13 6655.9,1098.43 DB2.1
DB3: DB3.1 Display.14 LPC_3.70 | length 4498.1
  Top Layer w10: LPC_3.70 3197.43,1535.43 3212.18,1550.18 3252,1553.35 3252,1648.5 v1(3177,1723.5) ; v1(3491,1723.5) 3491,1308.91 v1(3593,1206.91)
  Bottom Layer w10: v1(3177,1723.5) v1(3491,1723.5) ; v1(3593,1206.91) 3647.37,1261.29 3756.1,1261.29 3773.1,1244.29 3894.71,1244.29 3964.45,1174.55 5540.98,1174.55 5936,779.53 DB3.1 6128,779.53 6412.34,1063.87 6412.34,1126 6446.34,1160 6470.87,1160 Display.14
DB4: DB4.1 Display.15 LPC_3.69 | length 4445.8
  Top Layer w10: v1(3094,1525) 3103.25,1515.75 LPC_3.69 ; v1(3339,1534) 3386,1487 v1(3386,1451) ; v1(6322,1448) 6322,1148 6429,1041 6514.5,1041 Display.15
  Bottom Layer w10: v1(3094,1525) 3129.5,1489.5 3231.5,1489.5 3249.25,1507.25 3296.25,1507.25 3323,1534 v1(3339,1534) ; v1(3386,1451) 6319,1451 v1(6322,1448) ; Display.15 6776.38,877.95 DB4.1
DB5: DB5.1 Display.16 LPC_3.68 | length 4594.2
  Top Layer w10: LPC_3.68 3192.06,1496.06 v1(3210,1514) ; v1(6352,1488) 6407,1433 6496,1433 6513,1416 6513,1125.6 Display.16
  Bottom Layer w10: v1(3210,1514) 3220.25,1524.25 3272.75,1524.25 3307.47,1558.97 3368.58,1558.97 3388.29,1539.25 4827.25,1539.25 4893,1605 5339.21,1605 5451,1493.21 5537.21,1493.21 5562,1518 6322,1518 v1(6352,1488) ; DB5.1 6274,606.3 6334.52,666.82 6334.52,947.12 Display.16
DB6: DB6.1 Display.17 LPC_3.67 | length 5080.2
  Top Layer w10: v1(2971,1322) 2971,1504.28 2987.72,1521 3063.07,1521 3107.7,1476.38 LPC_3.67 ; v1(6066,1280) 6066,1126 6352,840 6609,840 6613,844 6613,941.33 Display.17
  Bottom Layer w10: v1(2971,1322) 3003.5,1289.5 3305.5,1289.5 3354.5,1338.5 3405.5,1338.5 3427,1360 5986,1360 v1(6066,1280) ; Display.17 6800,754.33 6800,693.42 6832,661.42 DB6.1
DB7: DB7.1 Display.18 LPC_3.66 | length 4642.4
  Top Layer w10: LPC_3.66 3207.69,1456.69 v1(3209,1458) ; v1(6297,1476.21) 6297,1148.48 6424.08,1021.4 6432.93,1021.4 Display.18
  Bottom Layer w10: v1(3209,1458) 3234,1458 3250.5,1474.5 3288.2,1474.5 3323.2,1509.5 4271.5,1509.5 4284.25,1522.25 5071.75,1522.25 5117.79,1476.21 v1(6297,1476.21) ; DB7.1 6352,405.51 6392,445.51 6392,904.6 Display.18
FS: Display.19 FS.1 LPC_3.51 | length 4788.5
  Top Layer w10: LPC_3.51 3192,1161.42 3206.08,1147.34 v1(3548.42,1147.34)
  Bottom Layer w10: v1(3548.42,1147.34) 3548.42,1207.35 3619.35,1278.29 3804.97,1278.29 3821.97,1261.29 3914.52,1261.29 3957.46,1218.35 5713.65,1218.35 6032,900 6196,900 6383,1087 6383,1160 6448,1225 6496,1225 6513,1208 6513,941.33 Display.19 6747.24,707.09 6747.24,518 6780.99,484.25 FS.1
GND: 11.1 "LCD Backlight.1" *59.1 *62.1 *63.1 *69.2 *73.1 *86.2 *92.1 *.2 BAT1.2 BUTTON.1 BUTTON.10 C1.2 C2.2 C4.2 C7.2 C90.2 C91.1 C92.2 C93.1 C144.1 C146.1 C148.1 C149.1 CAN1.2 CAN1.8 Contrast.3 D1.2 D2.2 Display.1 Display.2 ESD1.2 ESD1.5 ESD2.2 ESD2.5 GND.1 LPC_3.11 LPC_3.15 LPC_3.31 LPC_3.41 LPC_3.55 LPC_3.72 LPC_3.83 LPC_3.97 On_Off_Charge.2 Program_SD3.3 Program_SD3.5 Program_SD3.9 PWR1.1 PWR1.5 PWR1.6 PWR1.7 PWR1.8 R1.2 R47.1 SW1.1 SW2.1 SW3.1 SW4.1 U2.1 U2.5 U2.6 U2.7 U2.8 | length 30020
  Top Layer w11.81: LPC_3.15 2600,1358.27 ; LPC_3.11 2600,1437.01 2615,1422.01 2615,1373.27 2600,1358.27 ; 2649.5,1324.5 2615.73,1358.27 2600,1358.27 ; 2671.54,1187 2716.54,1142 ; LPC_3.97 2677.17,1766 2677.17,1853.17 ; LPC_3.31 2716.54,1142 ; v1(2731,1158) 2716.54,1143.54 2716.54,1142 ; v1(2868,1165) 2890.39,1165 2913.39,1142 LPC_3.41 ; 2952.76,1766 LPC_3.83 2952.76,1655.24 2979,1629 2979,1579 3098.8,1579 3103,1574.8 LPC_3.72 ; LPC_3.55 3228,1240.16
  Top Layer w17.72: 3521,1376.64 3521,1718 3537,1734 BUTTON.10@3546.26,1734 ; BUTTON.10 BUTTON.10@3546.26,1734 ; BUTTON.1 3776.57,1718 3760.57,1702 3562.26,1702 3546.26,1718 BUTTON.10@3546.26,1734
  Top Layer w23.62: CAN1.8 1616,2212.4 ; v1(1616,2118) 1616,2212.4 ; CAN1.2 1690,2262.4 1640,2212.4 1616,2212.4
  Top Layer w25.59: *59.1 5152,2337.6 5168,2321.6
  Top Layer w30: Program_SD3.5 2110.24,1565.35 C90.2 2369,906.59 v1(2369,826.06) ; 2649.5,1324.5 2649.5,1286.5 2632,1269 v1(2632,1187) 2671.54,1187 ; 2677.17,1766 2727.17,1816 2902.76,1816 2952.76,1766 ; 2677.17,1853.17 v1(2728,1904) ; 3228,1240.16 3236,1232.16 v1(3236,1192) ; 3521,1376.64 C92.2 ; v1(4612.53,1876) 5149,1876 ; *62.1 4750,1729.33 4783.46,1762.8 C144.1 5022,1762.8 5075.15,1815.95 5195.05,1815.95 ; 5168,2321.6 5168,2129 5149,2110 5149,1876 ; C146.1 C146.1@5458,1815.95 ; 11.1 5459,923.32 5459,1233 5441,1251 5441,1798.95 C146.1@5458,1815.95 ; 5149,1876 5149,1862 5195.05,1815.95 ; 5149,1876 5318.95,1876 5379,1815.95 ; 5195.05,1815.95 5379,1815.95 ; 5379,1815.95 C146.1@5458,1815.95
  Bottom Layer w23.62: -12,1349 22.04,1314.96 ESD1.5 ; ESD2.5 5.71,1732.29 -12,1750 -12,1895 -12,1955 8,1975 1166,1975 1274,2083 1581,2083 ; PWR1.8 2420.68,609.73 2440.95,630 C4.2 ; PWR1.1 2843.8,609.73 ; 3614,347 3614,249.67 U2.8
  Bottom Layer w25.59: 1213.59,601.38 *73.1 ; R1.2@2818.11,584.92 2891.49,584.92 ; 4082.5,640.93 *63.1 ; *92.1 5312.89,1117.13 ; 6256,1728 6288.01,1760.01 *86.2
  Bottom Layer w30: -12,1349 -12,1750 ; -12,1895 48,1955 1146,1955 1166,1975 ; ESD2.5 ESD2.2 ; ESD1.5 ESD1.2 ; *.2 1213.59,601.38 ; *73.1 1507,601.38 1510.23,604.61 1609.45,604.61 1751.61,604.61 1800,653 2006.97,653 2078,581.97 D1.2 ; v1(1616,2118) 1581,2083 2064,2083 ; C91.1 1774.21,1174.21 1831,1231 2044.59,1231 C90.2 2110.24,1187 v1(2632,1187) ; C2.2 1942.13,287.13 2140.95,485.95 D1.2 ; Program_SD3.3 Program_SD3.5 2088.98,1552.98 2080,1544 2016,1544 1997,1563 1997,1586.61 Program_SD3.9 1980.66,1594.93 1968,1594.93 1947,1615.93 1947,1729 2051.42,1833.42 2051.42,2070.42 2064,2083 ; v1(2369,826.06) C4.2 ; PWR1.5 PWR1.6 PWR1.7 ; PWR1.8 PWR1.7 ; v1(2728,1904) 2896,1904 2896,1952 ; v1(2731,1158) 3202,1158 3202,1165 ; 2843.8,609.73 2849.51,615.43 2922,615.43 ; v1(2868,1165) 3202,1165 ; 2891.49,584.92 2922,615.43 ; SW4.1 2940.95,1966 ; v1(3236,1192) 3209,1165 3202,1165 ; 3614,347 3512,449 3512,622.04 D2.2 ; U2.5 U2.6 U2.7 U2.8 U2.1 ; 4082.5,640.93 4082.5,1039 R47.1@4121.25,1077.75 ; *63.1 4375,585.63 4382.87,593.5 C149.1 ; v1(4612.53,1876) SW1.1 5574,2046 5627.61,2099.61 BAT1.2 5610,1977.32 5610,1750 5632,1728 6256,1728 ; SW1.1 4612.53,2118 4603.62,2126.91 4036.47,2126.91 4027.56,2118 SW2.1 4027.56,1986.56 4016,1975 3794.98,1975 3785.48,1984.5 3527.56,1984.5 SW3.1 3447.52,1966 2940.95,1966 ; *92.1 4809.86,1117.13 4801,1108.27 *69.2 4616.19,1108.27 4566,1058.07 C93.1 4333.68,1058.07 4314,1077.75 R47.1 R47.1@4121.25,1077.75 ; Contrast.3 5200.98,359 5238.42,359 5374,223.42 C148.1 5506.69,263.98 11.1 5312.89,1117.13 ; *86.2 6377,1787.4 6380.94,1783.46 Display.2 ; On_Off_Charge.2 6409.45,1844.88 Display.2 ; GND.1 6692.92,1905.51 Display.1 Display.2 ; 2064,2083 2192,2083 2216.54,2058.46 2216.54,2000 2503,2000 2551,1952 2896,1952 ; D1.2 2243,581.97 2265.24,559.73 PWR1.7 ; 2896,1952 2940.95,1952 2940.95,1966 ; 2922,615.43 C1.2 3281,615.43 3287.61,622.04 D2.2 ; D2.2 3460.4,713 3458.32,715.09 C7.2 3458.32,902 3704.72,1148.41 C92.2 3740.55,1157.09 3740.55,1111 3773.8,1077.75 R47.1@4121.25,1077.75
MISO: *.7 LPC_3.61 MISO.1 | length 3418.1
  Top Layer w10: LPC_3.61 3376,1358.27 3411,1393.27 3411,1793 v1(3395,1809)
  Bottom Layer w10: *.7 1155,1692.91 1174.68,1712.6 MISO.1 1702.75,1712.6 1918.35,1497 2388.02,1497 2684.02,1793 3057.59,1793 3085.09,1820.5 3175.04,1820.5 3186.54,1809 v1(3395,1809)
MOSI: *.6 LPC_3.60 MOSI.1 | length 2396.5
  Top Layer w10: v1(3020,1479) 3020,1424 3105.42,1338.58 LPC_3.60
  Bottom Layer w10: *.6 972.44,1472.44 MOSI.1 1858,1472.44 1875.94,1454.5 2679.57,1454.5 2704.06,1430.01 2796.47,1430.01 2833.97,1467.5 3008.5,1467.5 v1(3020,1479)
Net11_4: 11.4 R47.2 | length 1646
  Top Layer w10: v1(5076,880) 5076,1492.63 11.4
  Bottom Layer w10: R47.2 4194,937.99 4251.99,880 v1(5076,880)
Net*86_1: *86.1 BAT1.1 LPC_3.19 | length 6122.5
  Top Layer w10: LPC_3.19 2595.47,1279.53 2605,1270 2605,1153 2593,1141 v1(2593,1044) ; v1(3406,1287) 3433,1314 3433,2467 v1(3465,2499)
  Bottom Layer w10: v1(2593,1044) 2657,1108 3227,1108 v1(3406,1287) ; v1(3465,2499) 5520.88,2499 5625,2394.88 5732.28,2394.88 5850.12,2394.88 5856.3,2388.7 5856.3,2340.69 6226.99,1970 *86.1 5989.93,1787.4 5973,1804.33 BAT1.1@5736.22,1804.33
NetC144_2: C144.2 LPC_3.23 X3.1 | length 3444.7
  Top Layer w10: LPC_3.23 2519.79,1200.79 2509,1190 2509,1046 2570,985 v1(2594,985) ; v1(4710,1324) 4842,1456 4842,1623.03 C144.2 4990,1623.03 5083.5,1716.54 X3.1
  Bottom Layer w10: v1(2594,985) 2607.25,998.25 2675.8,998.25 2734.55,1057 2869.69,1057 2876.7,1064.01 2918.69,1064.01 2925.7,1057 3370,1057 3407,1094 3407,1228 3473,1294 3602.35,1294 3603.64,1295.29 3766.29,1295.29 3814,1343 3990,1343 4009,1324 v1(4710,1324)
NetC146_2: C146.2 LPC_3.22 X3.2 | length 4166
  Top Layer w10: v1(2463,1309) 2463,1259.47 2502,1220.47 LPC_3.22 ; X3.2 5345,1972.44 5361.73,1955.71 C146.2 5485,1955.71 5485,1895 5562,1818 v1(5562,1407.31)
  Bottom Layer w10: v1(2463,1309) 2559.5,1309 2590,1278.5 2638,1278.5 2681,1321.5 2928,1321.5 2953,1346.5 3221.5,1346.5 3232.5,1357.5 3312,1357.5 3327,1372.5 3356.79,1372.5 3386.29,1402 4485.5,1402 4490.81,1407.31 v1(5562,1407.31)
NetC148_2: C148.2 LPC_3.16 RTC1.1 | length 4573.9
  Top Layer w10: v1(2486,1385) 2486,1362 2509.42,1338.58 LPC_3.16 ; v1(4551.14,1489.86) 4629.61,1411.39 RTC1.1
  Bottom Layer w10: v1(2486,1385) 2498.5,1372.5 2855.33,1372.5 2899.33,1416.5 3273,1416.5 3349,1492.5 4279.62,1492.5 4292.37,1505.25 4535.75,1505.25 v1(4551.14,1489.86) ; RTC1.1 4660.12,83.66 C148.2
NetC149_2: C149.2 LPC_3.18 RTC1.2 | length 3675.2
  Top Layer w10: LPC_3.18 2611.21,1299.21 v1(2615,1303) ; v1(4461,1426.5) 4461,204.35 RTC1.2
  Bottom Layer w10: v1(2615,1303) 2650.5,1338.5 2904.5,1338.5 2929.5,1363.5 3093.7,1363.5 3104.7,1374.5 3297,1374.5 3312,1389.5 3343,1389.5 3380,1426.5 v1(4461,1426.5) ; RTC1.2 4622.05,185.04 C149.2
NetContrast_1: Contrast.1 Display.9 | length 2622.4
  Top Layer w10: v1(5000.98,639) 6591,639 6630,678 6630,1324.33 Display.9
  Bottom Layer w10: Contrast.1 v1(5000.98,639)
NetD1_1: D1.1 L1.1 PWR1.3 | length 1680.9
  Bottom Layer w10: D1.1 1944.1,412.1 1894,362 1894,198 1915,177 2246,177 2440,371 2440,499.47 ; L1.1 2307.48,305.21 2439.66,437.38 2439.66,499.13 2440,499.47 ; PWR1.3 2450.26,509.73 2440,499.47
NetD2_1: D2.1 L2.1 U2.3 | length 1388.7
  Bottom Layer w10: L2.1 3400,322.13 3541,181.13 3541,107 3593,55 3733,55 3827.67,149.67 U2.3 3894.67,149.67 3903,158 3903,346.04 3627,622.04 D2.1
NetLED1_-: LED1.- R1.1@1609.45,543.58 | length 300.3
  Bottom Layer w10: R1.1@1609.45,543.58 1609.45,399.84 1619.29,390 LED1.-
NetLED2_-: LED2.- R1.1@2818.11,523.9 | length 256.9
  Bottom Layer w10: LED2.- R1.1@2818.11,523.9
NetLPC_3_4: LPC_3.4 R79.2 | length 2918.9
  Top Layer w10: LPC_3.4 2623.8,1574.8 2656.5,1607.5 2881,1607.5 v1(2881.5,1607) ; v1(4925,1912) 4925,2276.57 R79.2
  Bottom Layer w10: v1(2881.5,1607) 2896.5,1607 2912,1591.5 3177.92,1591.5 3192.92,1606.5 3220.8,1606.5 3237.3,1623 3426,1623 3441.5,1607.5 3479.5,1607.5 3490.5,1618.5 4659.72,1618.5 4925,1883.78 v1(4925,1912)
POWER: 11.2 C1.1 C4.1 C92.1 C93.2 On_Off_Charge.1 PWR1.2 R10.1 U2.2 | length 8583.9
  Top Layer w10: v1(3336,1085) 3366.08,1054.92 3745.92,1054.92 3842.52,1151.51 C92.1 3912.43,1123 4044,1123 v1(4149,1018) ; 11.2 5312.02,868 5544,868 6125,1449 v1(6125,2169) 5354,2169 5299,2224 5299,2358 5308.52,2367.52 R10.1
  Bottom Layer w10: v1(3336,1085) 2670.95,1085 2600.56,1014.61 2573.79,1014.61 2569.11,1009.93 2569.11,969.48 2578.75,959.84 C4.1 2578.75,716.75 2496,634 2496,575.73 2512,559.73 PWR1.2 2596.73,559.73 2596.73,553 3074.51,553 3109.51,518 C1.1 3401.36,477.64 3588.72,290.28 3588.72,85.28 3602,72 3695.9,72 3823.57,199.67 U2.2 ; v1(4149,1018) 4248.69,918.31 C93.2 4785.31,918.31 4850,983 5197.02,983 11.2 ; v1(6125,2169) 6508.56,2169 6527.56,2150 On_Off_Charge.1
POWERIN: *.1 On_Off_Charge.3 R10.2 | length 7505.9
  Top Layer w10: *.1 838,819.48 838,1264.9 880,1306.9 944,1306.9 980.51,1343.4 v1(980.51,2467) ; R10.2 5376,2257.29 ; v1(5374,2467) 5387,2454 5387,2268.29 5376,2257.29 ; v1(5998.71,2257.29) 5376,2257.29
  Bottom Layer w10: v1(980.51,2467) v1(5374,2467) ; v1(5998.71,2257.29) 6128,2128 6291.34,2128 On_Off_Charge.3
RD: Display.6 LPC_3.64 RD.1 | length 4118.3
  Top Layer w10: v1(3043,1314) 2990.5,1366.5 2990.5,1494 3000,1503.5 3034.56,1503.5 3104,1434.06 3104,1425.32 3112,1417.32 LPC_3.64
  Bottom Layer w10: v1(3043,1314) 3296,1314 3337.5,1355.5 3365.11,1355.5 3390.75,1381.14 6293.91,1381.14 ; RD.1 6255.3,1342.52 6293.91,1381.14 ; Display.6 6386.5,1499.1 6386.5,1473.72 6293.91,1381.14
RD1: CAN1.4 LPC_3.46 | length 4447
  Top Layer w10: CAN1.4 1704.6,2362.4 1680,2387 1497,2387 1447,2337 1447,454 1484,417 2938,417 3011.81,490.81 LPC_3.46
RESET: Display.10 LPC_3.50 RESET.1 | length 3697.1
  Top Layer w10: LPC_3.50 3090.55,1122 3092.98,1121.72 3166.66,1113.34 3426.78,1113.34 3468.2,1071.92 3736.92,1071.92 3791,1126 3791,1222 3824,1255 v1(3956.39,1255) ; v1(6419,1273) 6419,1331.6 Display.10
  Bottom Layer w10: v1(3956.39,1255) 3976.04,1235.35 5744.14,1235.35 5794.45,1185.04 RESET.1 6331.04,1185.04 v1(6419,1273)
RESET3: LPC_3.17 Program_SD3.10 R81.2 | length 1843.4
  Top Layer w10: Program_SD3.10 1968,1636.61 1957,1625.61 1957,1565 2055,1467 2055,1146 2330,871 2330,820 2352,798 2388,798 2396,806 2396,1058 2346,1108 2346,1335.63 R81.2 2478.86,1335.63 2495.59,1318.9 LPC_3.17
SCK: *.8 LPC_3.62 SCK.1 | length 3106.9
  Top Layer w10: v1(2004.61,1941) 3240.81,1941 3314.5,1867.31 3314.5,1409.5 3282.95,1377.95 LPC_3.62
  Bottom Layer w10: *.8 1125,1850.39 1199.8,1925.2 SCK.1 1988.8,1925.2 v1(2004.61,1941)
SCL: *.4 LPC_3.58 RSCL.2 SCL.1 | length 4169.1
  Top Layer w10: v1(2933,1514.5) 2885,1466.5 v1(2885,1253) 2901,1269 3069,1269 3099.21,1299.21 LPC_3.58 ; RSCL.2 4168,1520.67 4190,1542.67 v1(4190,1567)
  Bottom Layer w10: *.4 1078.74,1051.18 SCL.1 2538,1051.18 2551.5,1064.68 2551.5,1094 2600.44,1142.94 2672,1142.94 ; v1(2885,1253) 2869,1253 2854.5,1238.5 2721.69,1238.5 2682.34,1199.15 ; v1(2933,1514.5) 2974,1555.5 3248.5,1555.5 3278.08,1585.08 3384.15,1585.08 3402.23,1567 v1(4190,1567) ; 2672,1142.94 2682.34,1153.29 2682.34,1199.15 ; 2672,1142.94 2682.34,1199.15
SDA: *.5 LPC_3.59 RSDA.2 SDA.1 | length 3844.3
  Top Layer w10: v1(1002,1328) v1(1052,1278) ; v1(3015,1392) 3015.98,1392 3085.88,1322.1 ; LPC_3.59 3104,1318.9 ; v1(4324,1480.75) 4324,1528.54 RSDA.2 ; 3085.88,1322.1 3100.8,1322.1 3104,1318.9 ; 3085.88,1322.1 3089.08,1318.9 3104,1318.9
  Bottom Layer w10: *.5 978.05,1377.95 1002,1354 v1(1002,1328) ; v1(1052,1278) 1066.22,1263.78 SDA.1 1421.26,1326.26 1450.5,1355.5 2866.33,1355.5 2902.83,1392 v1(3015,1392) 3286.5,1392 3370,1475.5 4306.75,1475.5 4312,1480.75 v1(4324,1480.75)
TCK3: LPC_3.5 Program_SD3.4 | length 478.1
  Top Layer w10: Program_SD3.4 2170.66,1668.3 2204.7,1668.3 2317.88,1555.12 LPC_3.5
TD1: CAN1.1 LPC_3.47 | length 2437.6
  Top Layer w10: CAN1.1 1759,2212.4 1759,1676 2031,1404 2031,1122 v1(2040,1113) ; LPC_3.47 v1(3031.5,1206.89)
  Bottom Layer w10: v1(2040,1113) 2513.85,1113 2560.79,1159.94 2656,1159.94 2665.34,1218.34 2724.5,1277.5 2896,1277.5 2966.61,1206.89 v1(3031.5,1206.89)
TDI3: LPC_3.2 Program_SD3.8 | length 722
  Top Layer w10: Program_SD3.8 2136.86,1734.5 2512.5,1734.5 2608,1639 2608,1619 2603.17,1614.17 LPC_3.2
TDO3: LPC_3.1 Program_SD3.6 | length 536.3
  Top Layer w10: Program_SD3.6 2169.86,1717.5 2389.33,1717.5 2472.97,1633.86 LPC_3.1
TERM: CAN1.5 LPC_3.26 | length 2734.2
  Top Layer w10: CAN1.5 1526,2362.4 1464,2300.4 1464,1443 2138,769 2582,769 2619,806 2619,1010 2618.11,1010.89 LPC_3.26
TMS3: LPC_3.3 Program_SD3.2 | length 460.6
  Top Layer w10: v1(2197,1693) 2235.3,1693 2333.81,1594.49 LPC_3.3
  Bottom Layer w10: Program_SD3.2 2188.98,1684.98 v1(2197,1693)
V_CONTRAST: Contrast.2 Display.4 | length 1942
  Top Layer w10: v1(5412,809) 5633.5,809 5918.5,1094 5918.5,1174.5 6251.2,1507.2 6251.2,1538.84 6394.36,1682 6422.11,1682 Display.4
  Bottom Layer w10: Contrast.2 5100.98,774 5135.98,809 v1(5412,809)
WR: Display.5 LPC_3.65 WR.1 | length 4649.9
  Top Layer w10: LPC_3.65 3188,1437.01 3200.01,1425 3288,1425 3294.5,1431.5 3294.5,1846 v1(3286,1854.5)
  Bottom Layer w10: v1(3286,1854.5) 3436.5,1854.5 3444,1847 4667,1847 4785.36,1965.36 4960.64,1965.36 5226,1700 6356,1700 6387.5,1731.5 6725.5,1731.5 6752.27,1704.73 ; Display.5 6692.13,1704.73 6752.27,1704.73 ; WR.1 6752.27,1704.73
pads on no net: 11.3 "LCD Backlight." *. *.15 *.16 *.17 *.18 *.19 *.20 *.21 BUTTON.6 BUTTON.7 BUTTON.8 BUTTON.9 BUTTON.11 BUTTON.12 BUTTON.13 BUTTON.14 BUTTON.15 Display.20 ESD1.3 ESD2.3 ESD2.4 LPC_3.6 LPC_3.7 LPC_3.8 LPC_3.9 LPC_3.13 LPC_3.14 LPC_3.20 LPC_3.21 LPC_3.24 LPC_3.25 LPC_3.27 LPC_3.29 LPC_3.30 LPC_3.37 LPC_3.38 LPC_3.39 LPC_3.40 LPC_3.44 LPC_3.45 LPC_3.48 LPC_3.49 LPC_3.56 LPC_3.57 LPC_3.63 LPC_3.82 LPC_3.85 LPC_3.86 LPC_3.87 LPC_3.88 LPC_3.89 LPC_3.90 LPC_3.91 LPC_3.92 LPC_3.93 LPC_3.94 LPC_3.95 LPC_3.98 LPC_3.99 LPC_3.100 On_Off_Charge. Program_SD3.7 SW1. SW2. SW3. SW4.

## Silkscreen, mask and mechanical layers (free items; w line width, h text height)
Top Overlay:
  the board outline again, w10

## Text inside footprints (layer, text, board x,y; h text height)
*: Bottom Overlay "Edge" at 476.38,393.7 h60 r270
C1: Bottom Overlay "C" at 3138.51,565.54 h60 r90
C2: Bottom Overlay "C" at 1971.13,195.46 h60 r90
C4: Bottom Overlay "C" at 2490.85,855.06 h60 r180
Display: Bottom Overlay "2" at 6490.87,1883.46 h50 r90; Bottom Overlay "1" at 6590.87,1883.46 h50 r90; Bottom Overlay "19" at 6590.87,823.46 h50 r90; Bottom Overlay "20" at 6490.87,823.46 h50 r90